# EAGLE board MotorControllerV2 (EAGLE 9.3.0)
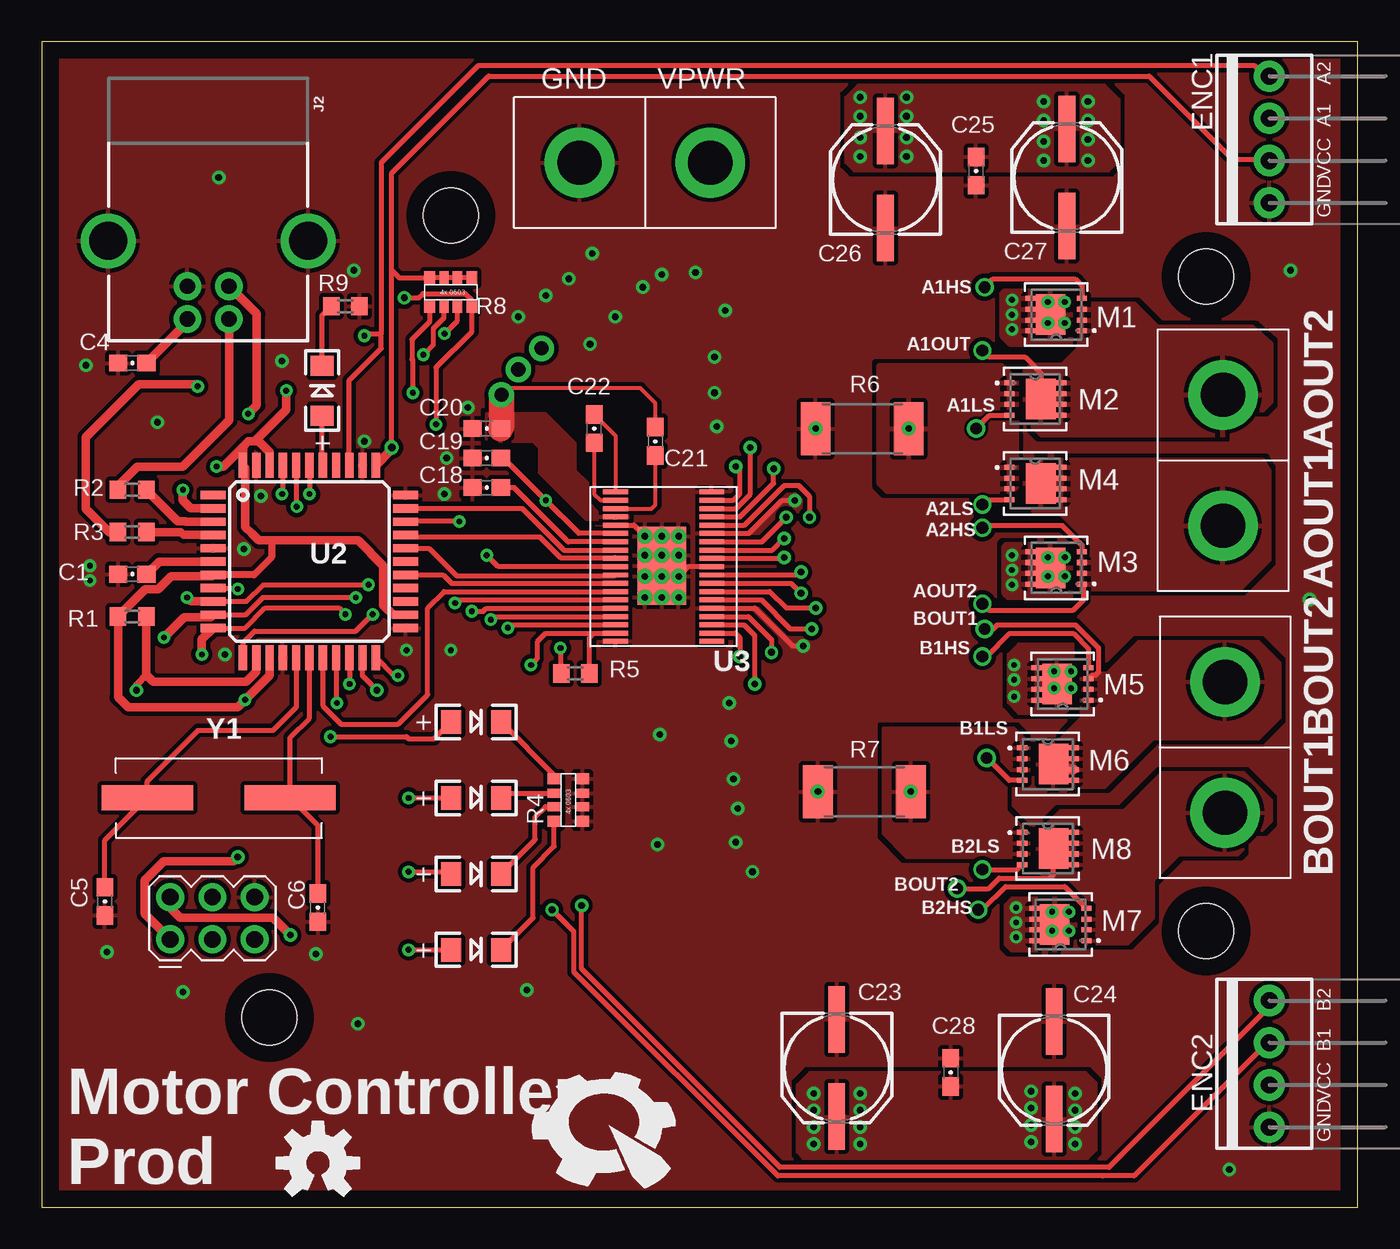
[diagram p0: board, top side]
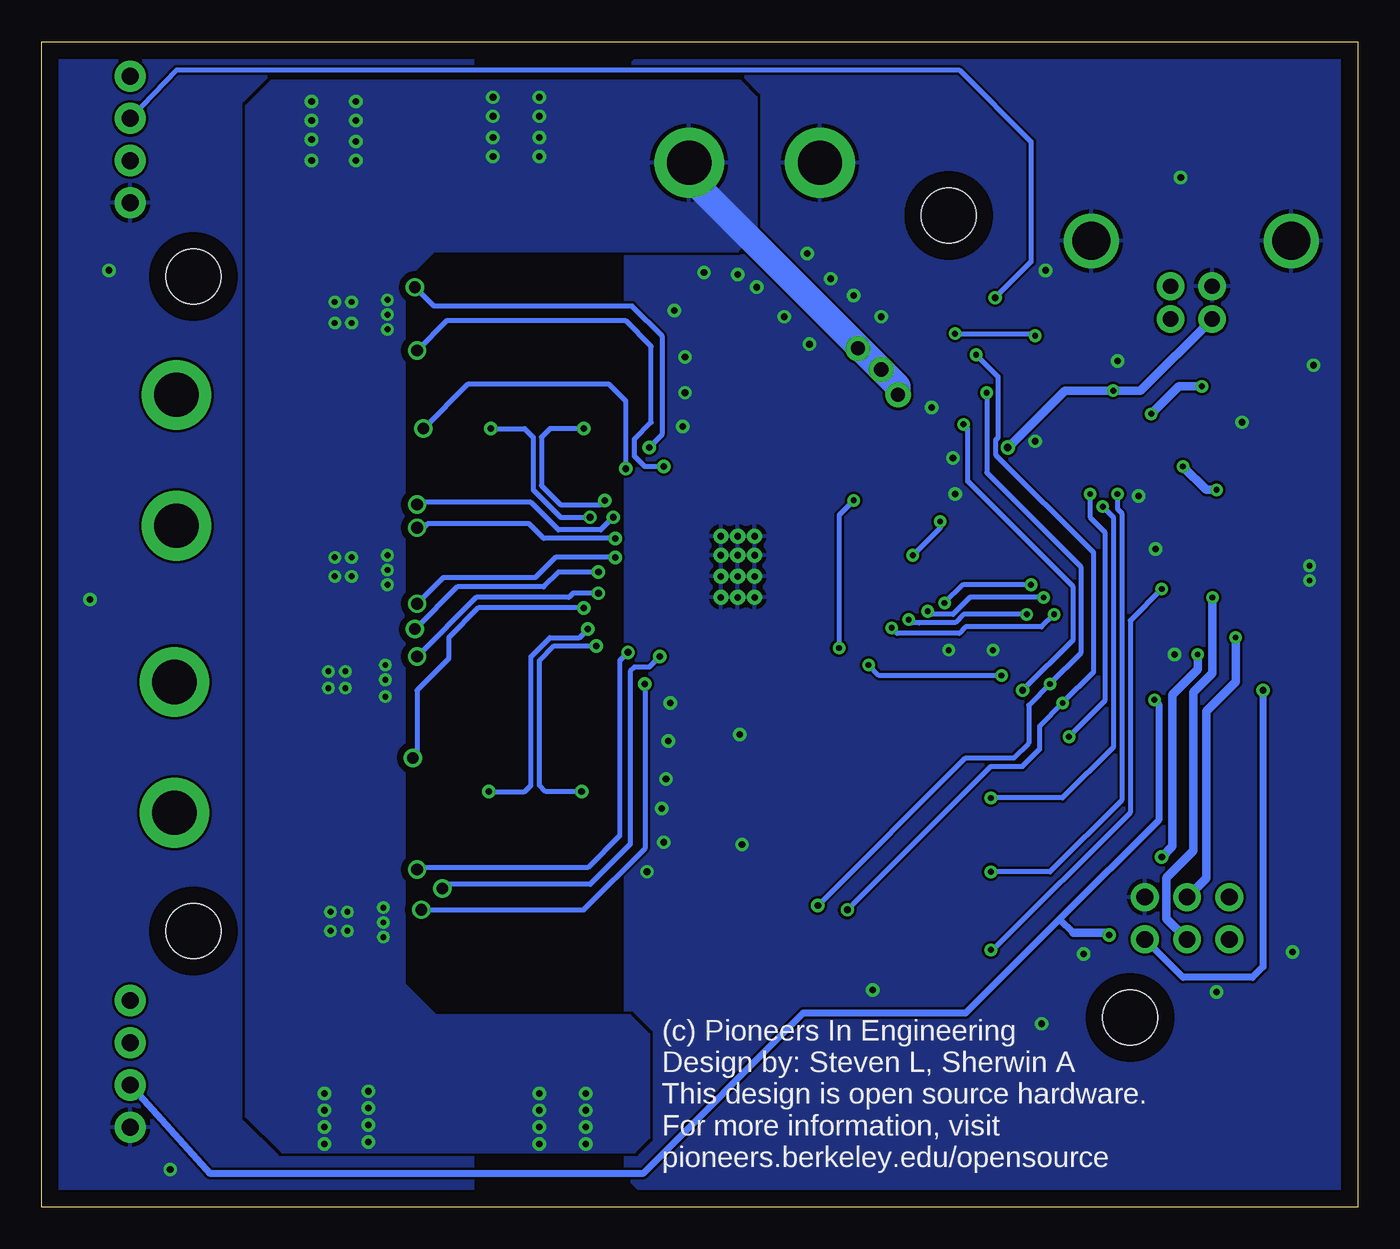
[diagram p1: board, bottom side, seen from below]

Size 79.25 x 70.15 mm. Coordinates in mm from the lower left corner, seen from the top.
Outline: 0,0 79.25,0 79.25,70.16 0,70.16 0,0
Copper layers (1*16): Top 0.035mm / dielectric 1.5mm / Bottom 0.035mm
Design rules "default": minimum track width 6mil, minimum drill 0.35mm, track to track 6mil, track to pad 6mil, pad to pad 6mil, via to via 6mil, smd to smd 6mil, copper to edge 40mil, drill to drill 6mil, minimum pad ring 10mil, minimum via ring 8mil, stop-mask expansion 4mil, vias tented up to drill 0mil, thermal gap 10mil

## Footprints (pad centres in the part's own frame; a part is rotated, then mirrored left to right if it is on the bottom)
0603-CAP = smd 1.1 x 1: 1 -0.85,0; 2 0.85,0
NIPPON_F80 = smd 4 x 1: + 2.925,0; - -2.925,0
ANDERSON_VERTICAL = drill 2.667 pad 4.191: PIN1 0,-3.937; PIN2 0,3.937
1X04-MTA = drill 1.016 pad 1.88: 1 -3.81,0; 2 -1.27,0; 3 1.27,0; 4 3.81,0
MA03-2 = drill 1 pad 1.676: 1 -2.54,-1.27; 2 -2.54,1.27; 3 0,-1.27; 4 0,1.27; 5 2.54,-1.27; 6 2.54,1.27
USB-B-PTH = drill 0.914 pad 1.676: D+ 4,1.25; D- 5.981,1.25; GND 4,-1.25; VBUS 5.981,-1.25 | drill 2.286: SHLD1 1.282,-6.02; SHLD2 1.282,6.02
LED-1206 = smd 1.2 x 1.4: A -1.5,0; C 1.5,0
DNH0008A = smd 0.61 x 0.305: 1 -1.55,0.975; 2 -1.55,0.325; 3 -1.55,-0.325; 4 -1.55,-0.975 | smd 0.635 x 0.305: 5 1.55,-0.975; 6 1.55,-0.325; 7 1.55,0.325; 8 1.55,0.975 | smd 1.778 x 2.438: 9 0.343,0
R0603 = smd 1 x 1.1: 1 -0.85,0; 2 0.85,0
4X-0603 = smd 0.65 x 0.8: 1 0,-0.05; 4 2.55,-0.05; 5 2.55,1.65; 8 0,1.65 | smd 0.55 x 0.8: 2 0.875,-0.05; 3 1.675,-0.05; 6 1.675,1.65; 7 0.875,1.65
R2512 = smd 1.8 x 3.2: 1 -2.8,0; 2 2.8,0
TQFP44 = smd 1.5 x 0.5: 1 -5.8,4; 2 -5.8,3.2; 3 -5.8,2.4; 4 -5.8,1.6; 5 -5.8,0.8; 6 -5.8,0; 7 -5.8,-0.8; 8 -5.8,-1.6; 9 -5.8,-2.4; 10 -5.8,-3.2; 11 -5.8,-4; 23 5.8,-4; 24 5.8,-3.2; 25 5.8,-2.4; 26 5.8,-1.6; 27 5.8,-0.8; 28 5.8,0; 29 5.8,0.8; 30 5.8,1.6; 31 5.8,2.4; 32 5.8,3.2; 33 5.8,4 | smd 0.5 x 1.5: 12 -4,-5.8; 13 -3.2,-5.8; 14 -2.4,-5.8; 15 -1.6,-5.8; 16 -0.8,-5.8; 17 0,-5.8; 18 0.8,-5.8; 19 1.6,-5.8; 20 2.4,-5.8; 21 3.2,-5.8; 22 4,-5.8; 34 4,5.8; 35 3.2,5.8; 36 2.4,5.8; 37 1.6,5.8; 38 0.8,5.8; 39 0,5.8; 40 -0.8,5.8; 41 -1.6,5.8; 42 -2.4,5.8; 43 -3.2,5.8; 44 -4,5.8
HTSSOP(38) = smd 1.5 x 0.3: P1 -2.794,4.064; P2 -2.794,3.564; P3 -2.794,3.064; P4 -2.794,2.564; P5 -2.794,2.064; P6 -2.794,1.564; P7 -2.794,1.064; P8 -2.794,0.564; P9 -2.794,0.064; P10 -2.794,-0.436; P11 -2.794,-0.936; P12 -2.794,-1.436; P13 -2.794,-1.936; P14 -2.794,-2.436; P15 -2.794,-2.936; P16 -2.794,-3.436; P17 -2.794,-3.936; P18 -2.794,-4.436; P19 -2.794,-4.936; P20 3.006,-4.936; P21 3.006,-4.436; P22 3.006,-3.936; P23 3.006,-3.436; P24 3.006,-2.936; P25 3.006,-2.436; P26 3.006,-1.936; P27 3.006,-1.436; P28 3.006,-0.936; P29 3.006,-0.436; P30 3.006,0.064; P31 3.006,0.564; P32 3.006,1.064; P33 3.006,1.564; P34 3.006,2.064; P35 3.006,2.564; P36 3.006,3.064; P37 3.006,3.564; P38 3.006,4.064 | smd 2.9 x 4.7: P39 0,-0.381 | drill 0.4: P40 -1.016,1.397; P41 0,1.397; P42 1.016,1.397; P43 0,-2.286; P44 1.016,-2.286; P45 -1.016,-2.286; P46 -1.016,-1.016; P47 0,-1.016; P48 1.016,-1.016; P49 1.016,0.254; P50 0,0.254; P51 -1.016,0.254
STAND-OFF = hole 3.302: 0,0
CRYSTAL-SMD-10.5X4.8-2PIN = smd 5.5 x 1.5: P$1 -4.3,0; P$2 4.3,0

## Placement (x,y rotation side)
C1  1uF  [0603-CAP]  5.46,38.1 0 top
C4  1uF  [0603-CAP]  5.46,50.8 0 top
C5  18pF  [0603-CAP]  3.81,18.42 90 top
C6  18pF  [0603-CAP]  16.64,18.03 90 top
C18  1uF  [0603-CAP]  26.8,43.31 0 top
C19  .1uF  [0603-CAP]  26.8,45.09 0 top
C20  .1uF  [0603-CAP]  26.8,46.86 0 top
C21  1uF  [0603-CAP]  36.96,46.1 90 top
C22  .1uF  [0603-CAP]  33.27,46.86 90 top
C23  220uF  [NIPPON_F80]  47.88,8.38 270 top
C24  220uF  [NIPPON_F80]  60.96,8.25 270 top
C25  .1uF  [0603-CAP]  56.26,62.36 90 top
C26  220uF  [NIPPON_F80]  50.8,61.85 90 top
C27  220uF  [NIPPON_F80]  61.72,61.98 90 top
C28  .1uF  [0603-CAP]  54.74,8.13 270 top
CONN1  ANDERSONVERTICAL  [ANDERSON_VERTICAL]  71.25,27.69 180 top
CONN2  ANDERSONVERTICAL  [ANDERSON_VERTICAL]  71.12,44.96 180 top
CONN3  ANDERSONVERTICAL  [ANDERSON_VERTICAL]  36.32,62.87 90 top
ENC1  [1X04-MTA]  73.91,64.26 90 top
ENC2  [1X04-MTA]  73.91,8.64 90 top
J1  AVR_SPI_PRG_6MA03-2  [MA03-2]  10.29,17.4 0 top
J2  USB_B_PTH  [USB-B-PTH]  10.03,59.44 270 top
LED1  RED  [LED-1206]  26.16,29.21 0 top
LED2  YELLOW  [LED-1206]  26.16,24.64 0 top
LED3  GREEN  [LED-1206]  26.16,20.07 0 top
LED4  RED  [LED-1206]  26.16,15.49 0 top
LED5  RED  [LED-1206]  16.89,49.15 90 top
M1  NMOS_CSD17579Q3A  [DNH0008A]  61.09,53.72 180 top
M2  NMOS_CSD17579Q3A  [DNH0008A]  59.82,48.64 0 top
M3  NMOS_CSD17579Q3A  [DNH0008A]  61.09,38.48 180 top
M4  NMOS_CSD17579Q3A  [DNH0008A]  59.82,43.56 0 top
M5  NMOS_CSD17579Q3A  [DNH0008A]  61.47,31.5 180 top
M6  NMOS_CSD17579Q3A  [DNH0008A]  60.58,26.67 0 top
M7  NMOS_CSD17579Q3A  [DNH0008A]  61.34,17.02 180 top
M8  NMOS_CSD17579Q3A  [DNH0008A]  60.58,21.59 0 top
R1  10k  [R0603]  5.46,35.56 180 top
R2  22  [R0603]  5.46,43.18 0 top
R3  22  [R0603]  5.46,40.64 0 top
R4  330  [4X-0603]  32.51,23.24 90 top
R5  10k  [R0603]  32.13,32.13 0 top
R6  10m  [R2512]  49.4,46.86 0 top
R7  10m  [R2512]  49.53,25.02 0 top
R8  10k  [4X-0603]  25.91,55.88 180 top
R9  330  [R0603]  18.29,54.23 0 top
U2  ATMEGA32U4-AU  [TQFP44]  16.13,38.86 0 top
U3  DRV8704  [HTSSOP(38)]  37.34,38.99 0 top
U$1  [PIE-LOGO-SMALL]  34.16,4.95 0 top
U$2  [OSHW-LOGO-M]  16.64,2.67 0 top
U$3  [STAND-OFF]  24.64,59.69 0 top
U$4  [STAND-OFF]  13.72,11.43 0 bottom
U$5  [STAND-OFF]  70.1,16.64 0 top
U$6  [STAND-OFF]  70.1,56.01 0 top
Y1  [CRYSTAL-SMD-10.5X4.8-2PIN]  10.67,24.64 0 top

## Library data of the parts
C1 C4-C6 C18-C21 C25 C28 = pie; PIE-INT-REF-NUM: CAPACITOR-GENERIC
C22 = pie; PIE-INT-REF-NUM: CAPACITOR-GENERIC; VMAX: 16V
C23 C24 C26 C27 R4 R8 U$1-U$6 = pie
CONN1-CONN3 = pie; PIE-INT-REF-NUM: Anderson
ENC1 ENC2 = pie; PIE-INT-REF-NUM: MTA
J1 = pie; PIE-INT-REF-NUM: BULK-STOCK
J2 = SparkFun-Connectors; PROD_ID: CONN-08278; SF_ID: PRT-00139
LED1-LED5 = pie; PIE-INT-REF-NUM: LED
M1-M8 = pie; PART_NO: CSD17579Q3A
R1-R3 R5 R9 = pie; DESCRIPTION: RESISTOR, American symbol; DISTRIBUTOR: DigiKey; MANUFACTURER: Rohm Semiconductor; NOTES: Cut Tape; PACKAGE: R0603
R6 R7 = pie; PIE-INT-REF-NUM: RESISTOR-GENERIC
U2 = pie; PIE-DIGIKEY-PN-ALT1: ATMEGA32U4-MURCT-ND; PIE-DIGIKEY-PN-PRI: ATMEGA32U4RC-MURCT-ND; PIE-INT-REF-NUM: ATmega32U4
U3 = pie; PART_NO: DRV8704
Y1 = pie; PIE-INT-REF-NUM: CRYSTAL

## Nets
A1: ENC1.3 R8.8 U2.21
A1HS: M1.4 U3.P36
A1LS: M2.4 U3.P35
A2: ENC1.4 R8.7 U2.36
A2HS: M3.4 U3.P31
A2LS: M4.4 U3.P32
AIN1: U2.31 U3.P10
AIN2: U2.29 U3.P11
AISENP: M2.1 M2.2 M2.3 M4.1 M4.2 M4.3 R6.2 U3.P34
AOUT1: CONN2.PIN1 M1.1 M1.2 M1.3 M2.5 M2.6 M2.7 M2.8 M2.9 U3.P37
AOUT2: CONN2.PIN2 M3.1 M3.2 M3.3 M4.5 M4.6 M4.7 M4.8 M4.9 U3.P30
B1: ENC2.3 R8.6 U2.19
B1HS: M5.4 U3.P27
B1LS: M6.4 U3.P26
B2: ENC2.4 R8.5 U2.20
B2HS: M7.4 U3.P22
B2LS: M8.4 U3.P23
BIN1: U2.27 U3.P12
BIN2: U2.18 U3.P13
BISENP: M6.1 M6.2 M6.3 M8.1 M8.2 M8.3 R7.2 U3.P25
BOUT1: CONN1.PIN1 M5.1 M5.2 M5.3 M6.5 M6.6 M6.7 M6.8 M6.9 U3.P28
BOUT2: CONN1.PIN2 M7.1 M7.2 M7.3 M8.5 M8.6 M8.7 M8.8 M8.9 U3.P21
CP1: C22.2 U3.P1
CP2: C22.1 U3.P2
D+: J2.D+ R3.1
D-: J2.D- R2.1
FAULTN: R5.2 U2.22 U3.P18
GND: C1.1 C4.1 C5.1 C6.1 C18.1 C19.1 C20.1 C23.- C24.- C25.1 C26.- C27.- C28.1 CONN3.PIN2 ENC1.1 ENC2.1 J1.6 J2.GND J2.SHLD1 J2.SHLD2 R4.1 R4.2 R4.3 R4.4 R6.1 R7.1 R9.2 U2.5 U2.15 U2.23 U2.33 U2.35 U2.43 U3.P5 U3.P19 U3.P24 U3.P29 U3.P33 U3.P38 U3.P39 U3.P40 U3.P41 U3.P42 U3.P43 U3.P44 U3.P45 U3.P46 U3.P47 U3.P48 U3.P49 U3.P50 U3.P51
HEARTBEAT: LED5.A U2.38
LED1: LED1.A U2.39
LED2: LED2.A U2.40
LED3: LED3.A U2.41
N$1: R2.2 U2.3
N$2: R3.2 U2.4
N$3: LED4.C R4.8
N$4: LED1.C R4.5
N$5: LED2.C R4.6
N$6: LED3.C R4.7
N$7: C6.2 U2.17 Y1.P$2
N$8: C5.2 U2.16 Y1.P$1
N$9: LED5.C R9.1
N$11: C1.2 U2.6
RESET: U2.30 U3.P9
RST: J1.5 R1.1 U2.13
RXLED: LED4.A U2.8
SCLK: J1.3 U2.9 U3.P14
SCS: U2.12 U3.P16
SDATI: J1.4 U2.10 U3.P15
SDATO: J1.1 U2.11 U3.P17
SLEEP: U2.32 U3.P8
V5: C19.2 R5.1 U3.P6
VCC: C4.2 ENC1.2 ENC2.2 J1.2 J2.VBUS R1.2 R8.1 R8.2 R8.3 R8.4 U2.2 U2.7 U2.14 U2.24 U2.34 U2.42 U2.44
VCP: C21.1 U3.P3
VINT: C18.2 U3.P7
VPWR: C20.2 C21.2 C23.+ C24.+ C25.2 C26.+ C27.+ C28.2 CONN3.PIN1 M1.5 M1.6 M1.7 M1.8 M1.9 M3.5 M3.6 M3.7 M3.8 M3.9 M5.5 M5.6 M5.7 M5.8 M5.9 M7.5 M7.6 M7.7 M7.8 M7.9 U3.P4

## Tracks (layer width: path | path; a pad name or v marks a point on that pad's centre or on a via)
A1  (via drill 0.35, 0.4)
  Top 0.305: v20.19,31.12 19.33,31.98 U2.21 | v23.75,47.12 23.75,50.55 25.91,52.7 R8.8 25.91,54.61 25.53,54.99 22.96,54.99 22.71,54.74 v21.84,54.74
  Bottom 0.305: v20.19,31.12 17.14,34.16 17.14,37.34 23.5,43.69 23.5,46.86 v23.75,47.12 | v21.84,54.74 19.68,56.9 19.68,64.13 24,68.45 71.12,68.45 ENC1.3
A1HS  (via drill 0.4, 0.7)
  Top 0.305: v56.77,55.37 57.28,55.88 62.23,55.88 62.64,55.47 M1.4 | U3.P36 41.8,42.05 42.67,42.93 v42.67,45.72
  Bottom 0.305: v56.77,55.37 55.63,54.23 43.69,54.23 41.91,52.45 41.91,46.48 v42.67,45.72
A1LS  (via drill 0.4, 0.7)
  Top 0.305: v56.26,46.86 57.06,47.67 M2.4 | U3.P35 42.06,41.55 44.07,43.56 v44.07,44.45
  Bottom 0.305: v44.07,44.45 44.07,48.51 45.09,49.53 53.59,49.53 v56.26,46.86
A2  (via drill 0.35)
  Top 0.305: U2.36 18.53,49.77 20.45,51.69 20.45,52.58 | 20.45,52.58 20.45,62.87 26.28,68.7 73.04,68.7 73.66,68.07 ENC1.4 | v24.26,52.58 25.03,53.35 R8.7 | v19.43,52.45 19.56,52.58 20.45,52.58
  Bottom 0.305: v24.26,52.58 19.56,52.58 v19.43,52.45
A2HS  (via drill 0.4, 0.7)
  Top 0.305: v56.64,40.89 56.77,41.02 61.47,41.02 62.64,39.85 M3.4 | U3.P31 44,39.55 v44.7,40.26
  Bottom 0.305: v56.64,40.89 56.26,40.89 56.01,41.15 49.91,41.15 49.02,40.26 v44.7,40.26
A2LS  (via drill 0.4, 0.7)
  Top 0.305: v56.64,42.29 56.94,42.59 M4.4 | U3.P32 43.35,40.05 v44.83,41.53
  Bottom 0.305: v44.83,41.53 45.59,40.77 48.13,40.77 49.78,42.42 56.52,42.42 v56.64,42.29
AIN1  (via drill 0.35)
  Top 0.305: U3.P10 27.49,38.55 v26.8,39.24 | v25.15,41.27 U2.31
  Bottom 0.305: v26.8,39.24 25.15,40.89 v25.15,41.27
AIN2
  Top 0.305: U2.29 23.33,39.66 24.98,38.01 34.5,38.01 U3.P11
AISENP  (via drill 0.4)
  Top 0.305: U3.P34 42.32,41.05 44.7,43.43 45.59,43.43 46.23,42.8 v46.23,41.53
  Bottom 0.305: R6.2 50.16,46.86 49.66,46.36 49.66,43.18 48.01,41.53 v46.23,41.53
  other vias: 52.2,46.86
  pour Top: 58.67,49.78 58.67,43.31 58.42,43.05 50.93,43.05 50.42,43.56 50.42,50.67 57.79,50.67
AOUT1  (via drill 0.4, 0.7)
  Top 0.305: v56.64,51.56 57.02,51.18 59.18,51.18 60.16,50.2 M2.9 | U3.P37 41.65,42.55 42.03,42.93 42.03,44.33 v41.78,44.58
  Bottom 0.305: v56.64,51.56 54.86,53.34 44.07,53.34 42.55,51.82 42.55,47.24 43.56,46.23 43.56,45.21 42.93,44.58 v41.78,44.58
  pour Top (isolate 0.254): 72.9,52.96 67.18,52.96 65.79,54.36 62.61,54.36 62.48,54.23 62.48,51.69 61.47,50.67 59.56,50.67 59.18,50.29 59.18,47.5 60.2,46.48 72.01,46.48 74.04,48.51 74.04,51.94
AOUT2  (via drill 0.4, 0.7)
  Top 0.305: M3.1 62.74,37.41 62.74,36.58 62.1,35.94 57.02,35.94 v56.64,36.32 | U3.P30 44.64,39.05 v44.7,39.12
  Bottom 0.305: v56.64,36.32 55.06,37.9 49.53,37.9 48.31,39.12 v44.7,39.12
  pour Top: 59.18,44.45 59.18,42.42 59.69,41.91 61.21,41.91 63.25,39.88 63.25,39.5 62.74,38.99 62.48,38.99 62.48,37.21 72.14,37.21 73.91,38.99 73.91,44.32 73.53,44.96 59.69,44.96
B1  (via drill 0.35, 0.4)
  Top 0.305: U2.19 17.73,30.4 v17.78,30.35 | v30.73,17.91 32.05,16.59 32.05,14.16 44.33,1.89 63.88,1.89 65.77,1.89 73.79,9.91 ENC2.3 | v22.99,51.31 23.57,51.9 23.57,52.86 24.23,53.52 R8.6
  Bottom 0.305: v30.73,17.91 22.1,26.54 20.19,26.54 19.18,27.56 19.18,28.96 v17.78,30.35 15.93,32.21 15.93,39.41 21.82,45.3 21.82,46.17 21.67,46.32 21.67,49.99 v22.99,51.31
B1HS  (via drill 0.4, 0.7)
  Top 0.305: v56.64,33.15 56.9,33.15 58.29,34.54 62.1,34.54 63.02,33.63 M5.4 | U3.P27 45.12,37.55 v45.72,36.96
  Bottom 0.305: v56.64,33.15 53.09,36.7 47.5,36.7 47.24,36.96 v45.72,36.96
B1LS  (via drill 0.4, 0.7)
  Top 0.305: M6.4 58.25,25.7 v56.9,27.05 | U3.P26 43.85,37.05 44.83,36.07 v46.61,36.07
  Bottom 0.305: v46.61,36.07 52.96,36.07 54.74,34.29 54.74,33.02 56.64,31.12 56.64,27.3 v56.9,27.05
B2  (via drill 0.35, 0.4)
  Top 0.305: U2.20 18.54,33.05 v18.54,31.5 | ENC2.4 73.79,11.94 64.26,2.41 44.45,2.41 32.51,14.35 v32.51,18.16 | R8.5 23.36,53.29 22.3,52.24 22.3,51.02 22.35,50.98 v22.35,49.02
  Bottom 0.305: v32.51,18.16 23.62,27.05 20.7,27.05 19.81,27.94 19.81,30.23 v18.54,31.5 16.69,33.35 16.69,38.55 22.35,44.21 v22.35,49.02
B2HS  (via drill 0.4, 0.7)
  Top 0.305: M7.4 62.89,18.01 61.59,19.3 58.04,19.3 56.64,17.91 v56.39,17.91 | U3.P22 42.29,35.05 42.93,34.42 v42.93,31.5
  Bottom 0.305: v42.93,31.5 42.93,21.59 46.61,17.91 v56.39,17.91
B2LS  (via drill 0.4, 0.7)
  Top 0.305: U3.P23 42.55,35.55 43.94,34.16 v43.94,33.4 | v56.64,20.32 58.73,20.32 M8.4
  Bottom 0.305: v43.94,33.4 44.45,32.89 44.45,22.35 46.35,20.45 56.52,20.45 v56.64,20.32
BIN1
  Top 0.305: U2.27 24.17,38.06 24.68,37.55 U3.P12
BIN2
  Top 0.305: U2.18 16.93,30.19 18.03,29.08 21.46,29.08 23.24,30.86 23.24,36.07 24.23,37.05 U3.P13
BISENP  (via drill 0.4)
  Top 0.305: U3.P25 43.33,36.55 45.09,34.8 v46.35,34.8
  Bottom 0.305: v52.32,25.02 50.16,25.02 49.78,25.4 49.78,33.15 48.64,34.29 46.86,34.29 v46.35,34.8
  pour Top (isolate 0.254): 59.44,27.94 59.44,26.16 59.31,26.04 58.29,26.04 58.04,25.78 58.04,23.88 59.44,22.48 59.44,21.21 59.31,21.08 52.07,21.08 50.67,22.48 50.67,28.83 58.55,28.83
BOUT1  (via drill 0.4, 0.7)
  Top 0.305: M5.3 63.21,32.01 63.45,32.01 63.63,32.19 63.63,33.67 62.24,35.05 57.53,35.05 57.28,34.8 v56.77,34.8 | U3.P28 45.55,38.05 v45.72,38.23
  Top 0.61: M6.6 61.25,26.35 M6.9
  Bottom 0.305: v56.77,34.8 54.23,37.34 49.02,37.34 48.13,38.23 v45.72,38.23
  pour Top (isolate 0.254): 62.87,32.13 62.61,31.88 62.61,29.46 61.09,27.94 60.07,27.94 59.94,27.81 59.94,25.53 60.2,25.27 64.01,25.27 66.93,28.19 73.28,28.19 74.55,29.46 74.55,32.77 73.28,34.04 66.04,34.04 64.13,32.13
BOUT2  (via drill 0.4, 0.7)
  Top 0.305: M8.9 60.92,20.03 60.71,19.81 57.66,19.81 57.02,19.18 v55.12,19.18 | U3.P21 41.77,34.55 42.04,34.29 v42.04,33.15
  Bottom 0.305: v42.04,33.15 42.67,32.51 43.56,32.51 43.81,32.26 43.81,21.84 46.23,19.43 54.86,19.43 v55.12,19.18
  pour Top (isolate 0.254): 60.33,22.86 60.07,22.86 59.94,22.73 59.94,20.32 60.83,19.43 61.98,19.43 63.37,18.03 63.37,17.65 63.25,17.53 62.74,17.53 62.74,15.88 65.41,15.88 66.93,17.4 66.93,19.69 68.45,21.21 72.01,21.21 74.04,23.24 74.04,24.51 72.39,26.16 67.44,26.16 65.15,23.88 61.34,23.88
CP1
  Top 0.254: C22.2 34.54,46.44 U3.P1
CP2
  Top 0.254: C22.1 33.27,42.93 33.65,42.55 U3.P2
D+  (via drill 0.35)
  Top 0.508: R3.1 4.06,40.64 2.67,42.04 2.67,46.36 5.84,49.53 9.27,49.53 v9.4,49.4 | v12.45,47.75 12.95,48.26 12.95,53.77 J2.D+
  Bottom 0.508: v9.4,49.4 10.79,49.4 v12.45,47.75
D-
  Top 0.508: J2.D- 11.28,47.36 8.5,44.58 5.75,44.58 4.61,43.43 R2.1
FAULTN  (via drill 0.35)
  Top 0.305: U3.P18 33.27,34.54 | U2.22 21.19,32 v21.46,32 | v29.46,32.64 29.84,33.02 29.84,34.04 30.35,34.54 33.27,34.54 | R5.2 32.98,34.25 33.27,34.54
  Bottom 0.305: v21.46,32 28.83,32 v29.46,32.64
GND  (via drill 0.35, 0.4)
  Top 0.305: U3.P29 38.93,38.55 U3.P48 | U3.P5 35.66,41.05 U3.P40 | U3.P33 42.59,40.55 44.58,42.55 v45.34,42.55 | U3.P24 42.94,36.05 45.21,33.78 v45.85,33.78
  Bottom 0.305: v46.61,46.86 48.64,46.86 49.15,46.36 49.15,43.43 48.01,42.29 45.59,42.29 v45.34,42.55 | R7.1 48.9,25.02 49.28,25.4 49.28,32.89 48.39,33.78 v45.85,33.78
  other vias: 2.92,38.61 2.92,37.72 21.97,33.53 24.64,33.53 46.74,25.02 41.4,30.35 41.53,28.07 41.66,25.78 41.91,24 41.78,21.97 42.8,20.19 37.21,28.45 37.08,21.84 29.21,13.08 3.94,15.37 16.51,15.24 2.67,50.67 14.48,50.93 10.67,61.98 33.15,57.4 31.75,55.88 30.35,54.86 28.7,53.59 33.02,51.94 34.54,53.59 36.2,55.37 37.34,56.13 39.37,56.26 75.18,56.39 76.33,36.58 71.5,2.29 8.51,12.95 19.05,11.05 12.19,39.62 11.05,33.27 24.26,42.93 19.43,46.1 24.38,45.09 25.65,48.13 13.21,42.8 40.51,51.18 41.15,53.98 40.51,49.02 40.64,46.99 18.8,56.39 6.99,47.24
  pour Top (isolate 0.254, rank 2): 0,70.74 93.09,70.74 93.09,-1.02 0,-1.02
  pour Bottom (rank 2): 42.55,69.98 1.02,69.98 -0.89,68.07 -0.89,0.38 -0.13,-0.38 41.78,-0.38 44.07,1.91 44.07,68.45
  pour Bottom (rank 2): 53.34,70.23 53.34,-0.51 53.47,-0.64 94.49,-0.64 95.12,0 95.12,69.09 93.98,70.23
HEARTBEAT
  Top 0.305: U2.38 16.89,44.7 LED5.A
LED1  (via drill 0.35)
  Top 0.305: U2.39 v16.13,42.93 | LED1.A 23.65,28.19 22.1,28.19 21.97,28.32 v17.4,28.32
  Bottom 0.305: v17.4,28.32 15.24,30.48 15.24,40.64 16.13,41.53 v16.13,42.93
LED2  (via drill 0.35)
  Top 0.305: U2.40 15.33,42.2 v15.37,42.16 | v22.1,24.64 LED2.A
  Bottom 0.305: v22.1,24.64 17.78,24.64 14.73,27.69 14.73,41.53 v15.37,42.16
LED3  (via drill 0.35)
  Top 0.305: U2.41 14.53,42.98 v14.48,42.93 | v22.1,20.19 24.54,20.19 LED3.A
  Bottom 0.305: v22.1,20.19 18.54,20.19 14.22,24.51 14.22,41.78 14.48,42.04 v14.48,42.93
N$1
  Top 0.508: R2.2 8.19,41.3 8.66,41.3 8.69,41.26 U2.3
N$2
  Top 0.508: R3.2 8.38,40.64 8.56,40.46 U2.4
N$3
  Top 0.305: LED4.C 29.59,17.42 29.59,20.45 30.86,21.72 R4.8
N$4
  Top 0.305: LED1.C 30.86,26.01 R4.5
N$5
  Top 0.305: LED2.C 27.94,24.92 R4.6
N$6
  Top 0.305: LED3.C 29.72,22.12 29.72,23.5 30.34,24.12 R4.7
N$7
  Top 0.305: U2.17 16.13,29.45 14.97,28.29 Y1.P$2 16.64,22.97 C6.2
N$8
  Top 0.305: U2.16 15.33,30.1 13.93,28.7 9.42,28.7 6.37,25.65 Y1.P$1 3.81,22.08 C5.2
N$9
  Top 0.305: LED5.C 16.89,53.68 R9.1
N$11
  Top 0.508: C1.2 7.07,38.86 U2.6
RESET
  Top 0.305: U2.30 22.06,40.34 30.01,40.34 31.25,39.1 34.5,39.1 U3.P9
RST  (via drill 0.4)
  Top 0.406: 6.31,32.04 5.71,31.45 v5.71,31.12
  Top 0.508: U2.13 12.93,32.23 12.32,31.62 6.73,31.62 6.31,32.04 R1.1
  Bottom 0.406: v5.71,31.12 5.71,14.48 6.35,13.84 10.54,13.84 J1.5
RXLED  (via drill 0.35)
  Top 0.305: U2.8 11.76,37.26 v11.81,37.21 | v22.1,15.49 LED4.A
  Bottom 0.305: v11.81,37.21 13.72,35.31 13.72,23.75 21.97,15.49 v22.1,15.49
SCLK  (via drill 0.35)
  Top 0.305: v24.89,36.37 25.07,36.55 U3.P14 | U2.9 12.33,36.46 13.34,37.47 v19.68,37.47
  Top 0.508: U2.9 9,36.46 v8.76,36.7
  Bottom 0.305: v19.68,37.47 23.8,37.47 v24.89,36.37
  Bottom 0.508: v8.76,36.7 8.76,32.13 9.91,30.99 9.91,21.46 11.53,19.84 11.53,17.37 J1.3
SCS  (via drill 0.35)
  Top 0.305: v27.05,35.37 27.24,35.55 U3.P16 | U2.12 12.13,33.97 12.83,34.67 18.92,34.67 v19.94,35.69
  Bottom 0.305: v19.94,35.69 23.74,35.69 24.24,35.19 26.41,35.19 26.42,35.18 26.86,35.18 v27.05,35.37
SDATI  (via drill 0.35)
  Top 0.305: v25.91,35.87 26.59,35.87 26.77,36.05 U3.P15 | U2.10 12.29,35.66 13.34,36.7 v18.92,36.7
  Top 0.508: U2.10 10.19,35.52 8.6,35.52 v7.37,34.29
  Bottom 0.305: v18.92,36.7 23.37,36.7 24.38,35.69 25.73,35.69 v25.91,35.87
  Bottom 0.508: v7.37,34.29 7.37,31.62 9.14,29.85 9.14,19.81 J1.4
SDATO  (via drill 0.35, 0.4)
  Top 0.305: U3.P17 28.25,35.05 v28.07,34.87 | U2.11 12.26,34.86 13.46,36.07 17.91,36.07 v18.29,35.69
  Top 0.508: U2.11 9.65,34.19 v9.65,33.27 | J1.1 6.22,17.65 6.22,19.69 7.37,20.83 11.56,20.83 v11.81,21.08
  Bottom 0.305: v28.07,34.87 27.74,34.54 24,34.54 23.62,34.93 19.05,34.93 v18.29,35.69
  Bottom 0.508: v9.65,33.27 9.65,32.38 11.18,30.86 11.18,21.72 v11.81,21.08
SLEEP
  Top 0.305: U2.32 28.93,42.06 31.44,39.55 U3.P8
V5  (via drill 0.35)
  Top 0.305: U3.P6 32.34,40.55 v30.35,42.55 27.81,45.09 C19.2 | v31.24,33.66 31.24,32.17 R5.1
  Bottom 0.305: v30.35,42.55 31.24,41.66 v31.24,33.66
VCC  (via drill 0.35, 0.4, 0.45)
  Top 0.305: v21.08,45.72 21.08,56.39 | 21.08,56.39 21.08,62.23 26.92,68.07 66.67,68.07 71.71,63.03 73.83,63.03 ENC1.2 | R8.1 R8.2 R8.3 R8.4 21.54,55.93 21.08,56.39
  Top 0.406: U2.7 12.8,38.06 13.84,39.11 13.84,40.13
  Top 0.508: v21.08,45.72 21.08,45.62 U2.34 | 12.13,45.78 U2.44 12.27,44.52 12.27,40.94 12.65,40.56 13.08,40.13 13.84,40.13 19.05,40.13 20.57,38.61 20.57,36.24 21.15,35.66 U2.24 | 12.13,45.78 12.45,46.1 12.83,46.1 | 12.83,46.1 13.08,46.1 13.73,45.45 U2.42 | v14.73,49.15 14.73,48.01 12.83,46.1 | U2.2 8.99,42.06 8.51,42.55 v8.51,43.18 | U2.14 13.73,32.02 v12.26,30.54 11.81,30.1 5.21,30.1 4.61,30.7 R1.2 6.25,37.19 7.03,37.19 7.81,37.97 10.24,37.97 U2.7 | 12.13,45.78 10.92,44.58 v10.54,44.58 | C4.2 8.78,53.27 J2.VBUS | J1.2 7.75,18.03 8.36,17.42 13.95,17.42 v14.99,16.38
  Bottom 0.406: v12.26,30.54 12,30.29 12,23.3 17.97,17.34 | 17.97,17.34 17.14,16.51 | ENC2.2 69.09,2.03 43.05,2.03 33.4,11.68 23.62,11.68 17.97,17.34
  Bottom 0.508: v10.54,44.58 9.14,43.18 v8.51,43.18 | J2.VBUS 13.09,49.15 v14.73,49.15 17.65,49.15 v21.08,45.72 | 17.14,16.51 15.11,16.51 v14.99,16.38
VCP
  Top 0.254: U3.P3 36.72,42.05 36.96,42.29 C21.1
VINT
  Top 0.305: C18.2 28.45,43.31 31.7,40.05 U3.P7
VPWR  (via drill 0.35, 0.4, 0.85 pad 1.52)
  Top 0.254: C21.2 36.96,48.39 36.07,49.28 28.07,49.28 v27.69,48.9
  Top 1.524: v27.69,48.9 27.69,47.03 C20.2
  Bottom 0.305: v30.1,51.69 28.77,50.36 28.64,50.36 | v28.7,50.42 27.69,49.4
  Bottom 1.524: CONN3.PIN1 40.26,61.98 33.66,55.37 31.24,52.96 28.64,50.36 27.69,49.4 v27.69,48.9
  other vias: 60.58,54.48 61.59,54.48 60.58,53.21 61.59,53.21 58.42,54.61 58.42,53.72 58.42,52.83 60.58,39.12 61.59,39.12 60.58,37.97 61.59,37.97 58.42,39.24 58.42,38.35 58.42,37.47 60.96,32.26 61.98,32.26 61.98,31.24 60.96,31.24 58.55,32.64 58.55,31.75 58.55,30.73 60.83,17.78 61.85,17.78 60.83,16.64 61.85,16.64 58.67,18.03 58.67,17.14 58.67,16.26 49.28,66.8 49.28,65.66 49.28,64.39 49.28,63.25 52.07,63.25 52.07,64.39 52.07,65.66 52.07,66.8 60.33,66.55 60.33,65.41 60.33,64.13 60.33,62.99 62.99,62.99 62.99,64.26 62.99,65.41 62.99,66.55 46.48,6.86 46.48,5.84 46.48,4.83 46.48,3.81 49.28,3.81 49.28,4.83 49.28,5.84 49.28,6.86 59.56,6.99 59.56,5.97 59.56,4.95 59.56,3.94 62.23,6.86 62.23,5.84 62.23,4.83 62.23,3.81
  pour Top: 58.8,33.91 58.17,33.27 58.17,30.35 58.8,29.72 61.59,29.72 62.1,30.23 62.1,33.91
  pour Top: 62.1,18.54 58.42,18.54 58.04,18.16 58.04,15.88 58.42,15.49 61.98,15.49 62.23,15.75 62.23,18.42
  pour Top: 61.85,55.12 57.91,55.12 57.79,54.99 57.79,52.45 58.29,51.94 61.98,51.94 61.98,54.99
  pour Top: 35.31,41.78 35.31,41.4 32.77,41.4 29.97,44.2 29.97,45.72 29.59,46.1 26.92,46.1 26.8,46.23 26.8,47.75 30.35,47.75 32.13,45.97 32.13,44.32 32.89,43.56 32.89,42.42 33.53,41.78
  pour Top: 61.85,39.88 58.04,39.88 57.91,39.75 57.91,36.96 58.17,36.7 61.98,36.7 61.98,39.75
  pour Top: 64.01,67.56 49.15,67.56 48.39,66.8 48.39,62.87 48.9,62.36 64.26,62.36 64.9,62.99 64.9,66.67
  pour Bottom (isolate 0.406): 65.41,67.82 37.21,67.82 36.2,66.8 36.2,58.67 37.34,57.53 55.63,57.53 57.4,55.75 57.4,13.46 55.5,11.56 43.81,11.56 42.67,10.41 42.67,4.19 43.56,3.3 64.77,3.3 66.93,5.46 66.93,66.29
  pour Top: 62.87,8.13 46.23,8.13 45.47,7.37 45.47,3.3 45.85,2.92 62.99,2.92 63.5,3.43 63.5,7.49

## Text on the board
tPlace: GND | VPWR | A2 | A1 | VCC | GND | B2 | B1 | VCC | GND
bPlace: (c) Pioneers In Engineering / Design by: Steven L, Sherwin A / This design is open source hardware. / For more information, visit / pioneers.berkeley.edu/opensource
tNames: A1HS | A1OUT | A1LS | AOUT2 | A2LS | A2HS | AOUT2 | AOUT1 | BOUT1 | B1HS | B1LS | BOUT2 | B2LS | BOUT1 | BOUT2 | B2HS | Motor Controller / Prod